# Altium PCB Teensy4-CANTool-Rev2.PcbDoc
Units mil, origin at the board's own origin, x right, y up, seen from the top; angles counter-clockwise.
Board outline 1207.34 x 2795 mil, 2 copper layers (Top Layer, Bottom Layer); 27 components, 38 nets, 145 pads, 18 vias.
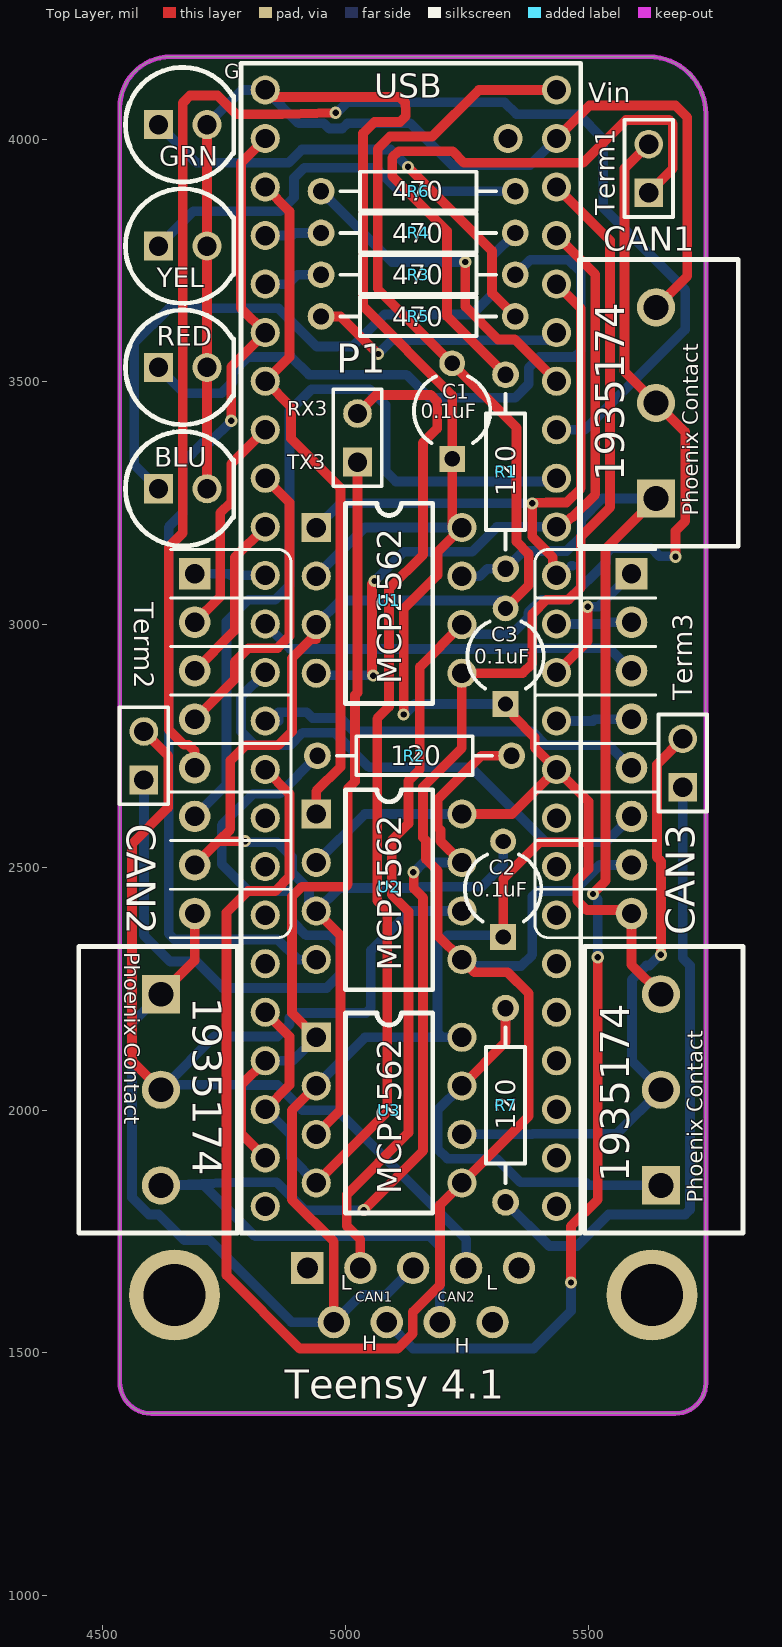
[diagram p0: Top Layer view]
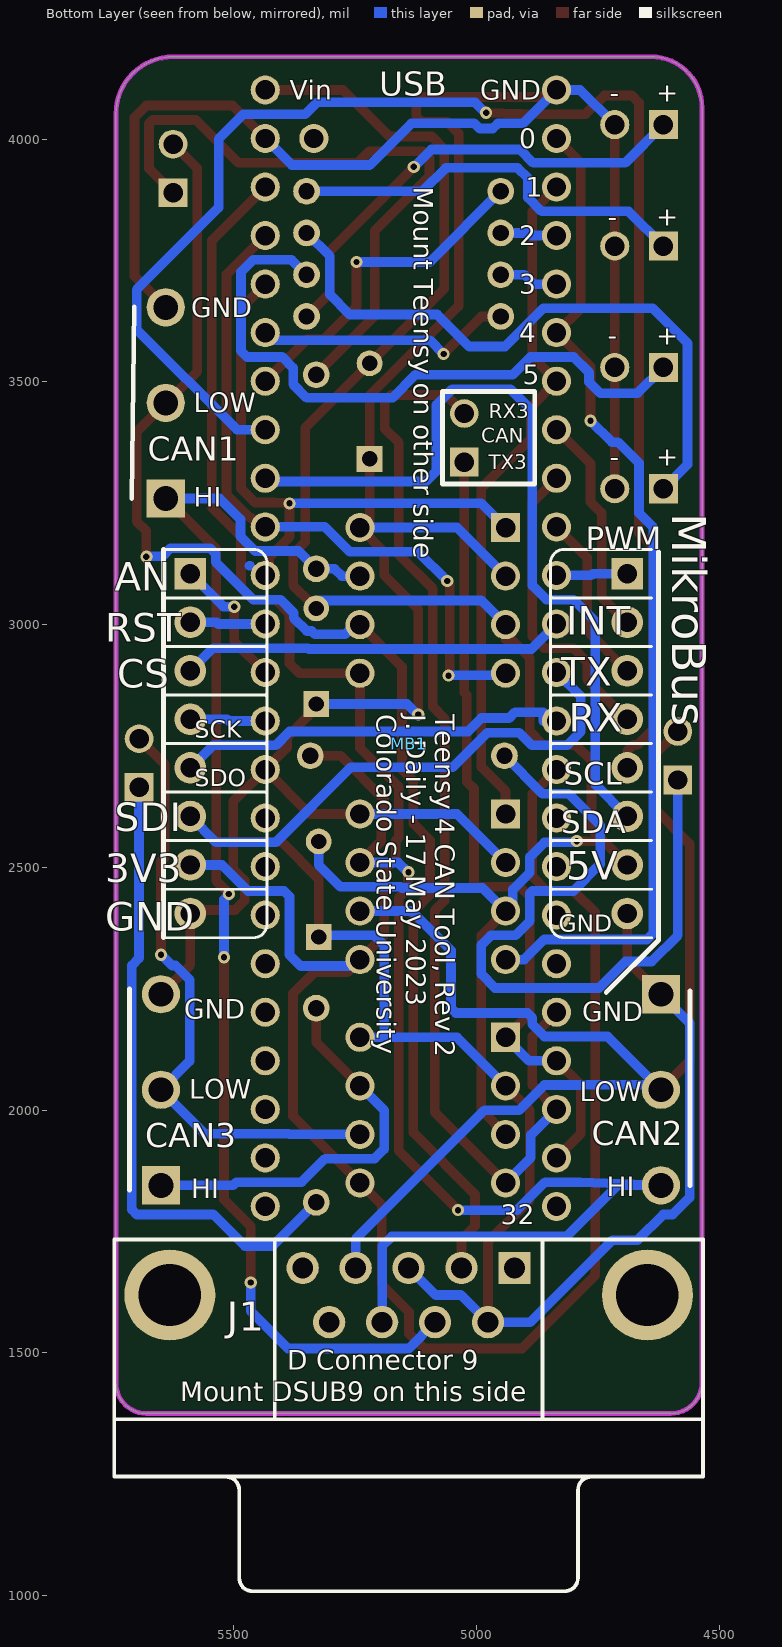
[diagram p1: Bottom Layer view, seen from below]

## Layer stack, top to bottom
Top Solder: solder mask 0.4, Solder Resist, Dk 3.5
Top Layer: signal copper 1.4
Dielectric 1: dielectric 12.6, FR-4, Dk 4.8
Bottom Layer: signal copper 1.4
Bottom Solder: solder mask 0.4, Solder Resist, Dk 3.5

## Board outline
4535.31,1439.69 ccw(c4600,1439.69) 4600,1375 5679.69,1375 ccw(c5679.69,1437.97) 5742.66,1437.97 5742.66,4052.34 ccw(c5625,4052.34) 5625,4170 4640,4170 ccw(c4640,4065.31) 4535.31,4065.31

## Design rules (kind name [scope] priority, off if disabled: settings)
Clearance [All] p1: gap=10 ignorepadtopadclearanceinfootprint=FALSE except(0: Arc-Hole Track-Hole SMDPad-Hole THPad-Hole Via-Hole Fill-Hole Poly-Hole Region-Hole Text-Hole)
PolygonConnect [All] p1: connectstyle=Relief reliefconductorwidth=10 reliefentries=4 polygonreliefangle="90 Angle" airgapwidth=10
RoomDefinition Teensy4-CANTool [InComponentClass('Teensy4-CANTool')] p1: confinementstyle=ConfineIn formatcopy=TRUE lockcomponents=FALSE outline 0,0 2000,0 2000,1000 0,1000
RoutingVias [All] p1: holewidth=13 width=25 viastyle="Through Hole" minholewidth=13 minwidth=20 maxholewidth=28 maxwidth=50
SolderMaskExpansion [All] p1: expansion=4 istentingtop=FALSE
Width [All] p1: maxlimit=50 minlimit=10 preferedwidth=20 minimp=50.000000 maximp=50.000000 favimp=50.000000
30 further rules are at their usual default settings.

## Components (designator, comment, footprint, x,y, rotation, side; value= is the part's Value field where it differs from the comment)
BLU "LED" "LED - 5mm Through Hole" 4615,3280 r180 top
C1 "0.1uF" CAPR5-4X5 5220,3440 r90 top
C2 "0.1uF" CAPR5-4X5 5325,2455 r90 top
C3 "0.1uF" CAPR5-4X5 5330,2935 r90 top
CAN1 "Header 3" "PCB TERMINAL BLOCK - 3" 5640,3260 r90 top
CAN2 "Header 3" "PCB TERMINAL BLOCK - 3" 4620,2238.7 r270 top
CAN3 "Header 3" "PCB Terminal Block - 3" 5650,1845 r90 top
GRN "LED" "LED - 5mm Through Hole" 4615,4030 r180 top
J1 "D Connector 9" DSUB1.385-2H9 5139.76,1245 r0 bottom locked
MB1 "mikroBUS" "mikroBUS - Midi" 5639.46,2255 r180 bottom locked
P1 "Header 2" HDR1X2 5025,3335 r90 top
R1 "120" AXIAL-0.4 5330,3315 r90 top
R2 "120" AXIAL-0.4 5142.38,2730 r180 top
R3 "470" AXIAL-0.4 5150,3721 r180 top
R4 "470" AXIAL-0.4 5150,3807 r180 top
R5 "470" AXIAL-0.4 5150,3635 r180 top
R6 "470" AXIAL-0.4 5150,3893 r180 top
R7 "120" AXIAL-0.4 5330,2010 r270 top
RED "LED" "LED - 5mm Through Hole" 4615,3530 r180 top
"Teensy 4.1" "Teensy 4.1" "Teensy 4.1" 4835,2801.57 r0 top
Term1 "Header 2" HDR1X2 5625,3890 r90 top
Term2 "Header 2" HDR1X2 4585,2680 r90 top
Term3 "Header 2" HDR1X2 5695,2665 r90 top
U1 "MCP2562" DIP8 4940,3200 r0 top
U2 "MCP2562" DIP8 4940,2610 r0 top
U3 "MCP2562" DIP8 4940,2150 r0 top
YEL "LED" "LED - 5mm Through Hole" 4615,3780 r180 top

## Footprints (in the part's own frame and the unit in brackets; to place one, negate y for a bottom-side part, rotate by r counter-clockwise, add the part's x,y. Pads: shape width x height; smd on the part's side, far side on the other; paste and mask are expansions set on the pad)
AXIAL-0.4 [mm] "Axial Device, Thru-Hole; 2 Leads; 0.4 in Pin Spacing"
  round 1.4 hole 0.85: 1(-5.08,0) 2(5.08,0)
  silkscreen extent -4.06,-1.02 4.06,1.02
CAPR5-4X5 [mm] "Capacitor; 2 Leads"
  rect 1.35x1.35 hole 0.8: 1(-2.5,0)
  round 1.35 hole 0.8: 2(2.5,0)
  silkscreen extent -1.69,-2 1.82,2
DIP8 [mil]
  rect 60x60 hole 40: 1(0,0)
  round 60 hole 40: 2(0,-100) 3(0,-200) 4(0,-300) 5(300,-300) 6(300,-200) 7(300,-100) 8(300,0)
  silkscreen extent 60,-362 240,50
DSUB1.385-2H9 [mm] "Connector; D Subminiature; 9 Position; Right Angle; Pitch 1.385 mm"
  rect 1.69x1.69 hole 1.09: 1(-5.54,-10.92)
  round 1.69 hole 1.09: 2(-2.77,-10.92) 3(0,-10.92) 4(2.77,-10.92) 5(5.54,-10.92) 6(-4.155,-8.08) 7(-1.385,-8.08) 8(1.385,-8.08) 9(4.155,-8.08)
  round 4.76 hole 3.26: 10(-12.495,-9.5) 11(12.495,-9.5)
  silkscreen extent -15.4,-12.4 15.4,6
HDR1X2 [mm] "Connector; Header; 2 Position"
  rect 1.5x1.5 hole 1.016: 1(0,0)
  round 1.5 hole 1.016: 2(2.54,0)
  silkscreen extent -1.27,-1.27 3.81,1.27
"LED - 5mm Through Hole" [mil] "Vishay TLCS510 Ultrabright LED, Ø 5 mm Untinted Non-Diffused Package"
  rect 60x60 hole 40: 1(0,0)
  round 60 hole 40: 2(-100,0)
  silkscreen extent -155,-118 68,118
"mikroBUS - Midi" [mil]
  rect 65x65 hole 40: 1(50,850) 16(950,850)
  round 65 hole 40: 2(50,750) 3(50,650) 4(50,550) 5(50,450) 6(50,350) 7(50,250) 8(50,150) 9(950,150) 10(950,250) 11(950,350) 12(950,450) 13(950,550) 14(950,650) 15(950,750)
  silkscreen extent 0,100 1000,900, body extent -5,100 1010,900, height 82
"PCB TERMINAL BLOCK - 3" [mm] "3 Position Wire to Board Terminal Block Horizontal with Board 0.197\" (5.00mm) Through Hole"
  rect 2x2 hole 1.3: 1(0,0)
  round 2 hole 1.3: 2(5,0) 3(10,0)
  silkscreen extent -2.5,-4.3 12.5,4
"PCB Terminal Block - 3" [mm] "3 Position Wire to Board Terminal Block Horizontal with Board 0.197\" (5.00mm) Through Hole"
  rect 2x2 hole 1.3: 1(0,0)
  round 2 hole 1.3: 2(5,0) 3(10,0)
  silkscreen extent -2.5,-4.3 12.5,4
"Teensy 4.1" [mil] "32 bit Arduino Compatible Microcontroller www.pjrc.com/teensy"
  round 60 hole 40: 0(0,1200) 1(0,1100) 2(0,1000) 3(0,900) 3V3a(600,1100) 3V3c(0,-100) 4(0,800) 5(0,700) 6(0,600) 7(0,500) 8(0,400) 9(0,300) 10(0,200) 11(0,100) 12(0,0) 13(600,0) 14(600,100) 15(600,200) 16(600,300) 17(600,400) 18(600,500) 19(600,600) 20(600,700) 21(600,800) 22(600,900) 23(600,1000) 24(0,-200) 25(0,-300) 26(0,-400) 27(0,-500) 28(0,-600) 29(0,-700) 30(0,-800) 31(0,-900) 32(0,-1000) 33(600,-1000) 34(600,-900) 35(600,-800) 36(600,-700) 37(600,-600) 38(600,-500) 39(600,-400) 40(600,-300) 41(600,-200) G1(0,1300) G2(600,1200) G4(600,-100) Vin(600,1300) VUSB(500,1200)
  silkscreen extent -50,-1055 650,1355

## Part data
BLU: "Blue 470nm LED Indication - Discrete 3.2V Radial", Manufacturer="Würth Elektronik", PartNumber=151051BS04000, Supplier Part Number 1=732-5015-ND, Supplier 1=Digi-Key
C1 C2 C3: library part Cap, "0.1µF ±10% 50V Ceramic Capacitor X7R 0603 (1608 Metric)", Manufacturer="Vishay Beyschlag/Draloric/BC Components", PartNumber=K104K15X7RF53H5, Supplier Part Number 1=BC3323-ND, Supplier 1=Digi-Key
CAN1 CAN2 CAN3: "Header, 3-Pin", Manufacturer="Phoenix Contact", PartNumber=1935174, Supplier Part Number 1=277-1578-ND, Supplier 1=Digi-Key
GRN: "Green 572nm LED Indication - Discrete 2.1V Radial", Manufacturer="Würth Elektronik", PartNumber=151051VS04000, Supplier Part Number 1=732-5017-ND, Supplier 1=Digi-Key
J1: "CONN D-SUB PLUG 9POS R/A SLDR", Manufacturer="Assmann WSW Components", PartNumber="A-DS 09 A/KG-T2S", Supplier Part Number 1=AE10968-ND, Supplier 1=Digi-Key
MB1: library part "mikroBUS compatible add-on board", "mikroBUS compatible add-on board"
P1: "Header, 2-Pin"
R1 R2 R7: library part Res1, "120 Ohms ±5% 0.25W, 1/4W Through Hole Resistor Axial Carbon Film", Manufacturer=YAGEO, PartNumber=CFR-25JB-52-120R, Supplier Part Number 1=120QBK-ND, Supplier 1=Digi-Key
R3 R4 R5 R6: library part Res1, "470 Ohms ±5% 0.25W, 1/4W Through Hole Resistor Axial Carbon Film", Manufacturer=YAGEO, PartNumber=CFR-25JB-52-470R, Supplier Part Number 1=470QBK-ND, Supplier 1=Digi-Key
RED: "Red 645nm LED Indication - Discrete 2.1V Radial", Manufacturer="Würth Elektronik", PartNumber=151051RS11000, Supplier Part Number 1=732-5016-ND, Supplier 1=Digi-Key
"Teensy 4.1": "32 Bit Arduino-Compatible iMX Microcontroller", Manufacturer=PRJC, Supplier Part Number 1=1568-DEV-16771-ND, PartNumber="Teensy 4.1", Supplier 1=Digi-Key
Term1 Term2 Term3: "2 (1 x 2) Position Shunt Connector Open Top, Grip 0.100\" (2.54mm) Gold", Manufacturer="Sullins Connector Solutions", PartNumber=NPC02SXON-RC, Supplier Part Number 1=S9341-ND, Supplier 1=Digi-Key
U1 U2 U3: library part MCP2551, "1/1 Transceiver CANbus 8-PDIP", Manufacturer="Microchip Technology", PartNumber=MCP2562FD-E/P, Supplier Part Number 1=MCP2562FD-E/P-ND, Supplier 1=Digi-Key
YEL: "Yellow 590nm LED Indication - Discrete 2V Radial", Manufacturer="Würth Elektronik", PartNumber=151051YS04000, Supplier Part Number 1=732-5018-ND, Supplier 1=Digi-Key

## Via types
v1: diameter 25, hole 13, Top Layer to Bottom Layer, 18 vias

## Nets (pads, with @x,y where several pads share a name; then routed paths per layer and width w, separated by ;. In a path a pad name is that pad's centre, name@x,y a point inside that pad or via, vN(x,y) a via of type N, cw(c..) or ccw(c..) an arc to the next point about the centre after c; other vN are vias at no path point)
3V3: "Teensy 4.1.3V3a" "Teensy 4.1.3V3c" MB1.7 U1.5 U2.5 U3.5 | length 5015.4
  Top Layer w20: 4835,2701.57 4885,2651.57 4885,2480.86 4855.71,2451.57 4799.57,2451.57 4755,2407 4755,1660 4906,1509 5108,1509 5139,1540 5139,1584 5195,1640 5195,1805 U3.5 5378,1988 5378,2240 5334,2284 5266,2284 U2.5 5190,2360 5190,2493.1 5166.14,2516.96 5166.14,2555.6 5160,2561.74 5160,2665.79 5240,2745.79 U1.5 5365,2900 5385,2920 5385,3022.29 5414.29,3051.57 5460,3051.57 5485,3076.57 5485,3181.79 5545,3241.79 5545,3791.57 5435,3901.57
  Bottom Layer w20: U2.5 5253,2297 5362,2297 5385,2320 5385,2440 5396.57,2451.57 5470.61,2451.57 5524.04,2505 MB1.7
5V: "Teensy 4.1.Vin" C1.2 C2.2 C3.2 MB1.10 U1.3 U2.3 U3.3 | length 3842.4
  Top Layer w20: MB1.10 4738.46,2554 ; v1(4793.48,2554) 4738.46,2554 ; U3.3 4990,2000 4990,2360 U2.3 ; U1.3 4940,2970 4928.92,2970 4890,2931.08 4890,2780 4861.57,2751.57 4794.57,2751.57 4763,2720 4763,2578.54 4738.46,2554 ; C3.2@5329.17,3044.25 5340.83,3044.25 5377.56,3080.99 5377.56,3145.88 5352.5,3170.94 5352.5,3405.93 C1.2 5066.5,3691.93 5066.5,3980 5092.06,4005.56 5178.99,4005.56 5275,4101.57 5435,4101.57
  Bottom Layer w20: v1(4793.48,2554) 4795.91,2551.57 4860,2551.57 4890,2521.57 4890,2489.29 4925,2454.29 4925,2410 U2.3 4987.5,2457.5 5153.46,2457.5 5155.96,2460 5280,2460 5325,2505 C2.2 ; U1.3 4990,3050 5325,3050 C3.2@5325,3048.43
AN: "Teensy 4.1.14" MB1.1 | length 280.6
  Top Layer w20: 5435,2901.57 5499,2965.57 v1(5499,3037)
  Bottom Layer w20: v1(5499,3037) 5521.46,3037 MB1.1
Blue: "Teensy 4.1.2" R4.2 | length 117.2
  Bottom Layer w20: 4835,3801.57 4889.57,3801.57 4895,3807 R4.2
CANH1: CAN1.1 J1.7 R1.1 U1.7 | length 2675.7
  Top Layer w20: v1(5465,1645) 5465,1760.86 5520,1815.86 v1(5520,2315) ; v1(5510,2445) 5510,2446.35 5536,2472.35 5536,3156 CAN1.1
  Bottom Layer w20: J1.7 5139.35,1509 5388,1509 5465,1586 v1(5465,1645) ; U1.7 5277,3100 5292,3115 R1.1 5366.57,3151.57 5455.71,3151.57 5486.12,3181.99 5486.12,3217.09 5529.04,3260 CAN1.1 ; v1(5510,2445) 5510,2443.65 5520,2433.65 v1(5520,2315)
CANH2: CAN2.3 J1.8 R2.1 U2.7 | length 2428.4
  Top Layer w20: v1(5038,1794) 5160,1916 5160,2437.5 5140.96,2456.54 5140.96,2489.04 v1(5140,2490) ; U2.7 5196.14,2553.86 5196.14,2576.96 5190,2583.1 5190,2640 5280,2730 R2.1
  Bottom Layer w20: v1(5038,1794) 4916,1794 4858.43,1851.57 4786.57,1851.57 CAN2.3 4709.26,1845 4814.26,1740 5174.29,1740 5194.29,1720 J1.8 ; v1(5140,2490) 5141.35,2490 5161.35,2510 U2.7
CANH3: CAN3.1 R7.1 U3.7 | length 839.1
  Top Layer w20: U3.7 5330,2140 R7.1
  Bottom Layer w20: U3.7 5190,2000 5190,1920 5210,1900 5311.57,1900 5360,1851.57 5494.43,1851.57 5501,1845 CAN3.1
CANL1: CAN1.2 J1.2 Term1.2 U1.6 | length 2939.4
  Top Layer w20: J1.2 5030.71,1733.61 5002.92,1761.4 5002.92,1826.5 5130,1953.58 5130,2409.24 5095.5,2443.74 5095.5,2555.6 5130,2590.1 5130,2678.22 5153.27,2701.49 5153.27,2913.27 U1.6 ; Term1.2 5575,3940 5575,3521.85 5700,3396.85 5700,3212.98 5680,3192.98 v1(5680,3140)
  Bottom Layer w20: U1.6 5250.82,3000 5270.82,2980 5332.57,2980 5339.42,2986.85 5349.29,2986.85 5376.57,3014.13 5376.57,3024.57 5403.57,3051.57 5460,3051.57 5536.96,3128.53 5536.96,3145.78 5548.68,3157.5 5630.24,3157.5 5646.79,3140.96 5679.04,3140.96 v1(5680,3140)
CANL2: CAN2.2 J1.4 Term2.2 U2.6 | length 2473.8
  Top Layer w20: Term2.2 4635,2730 4635,2623 4560.63,2548.63 4560.63,2101.22 CAN2.2
  Bottom Layer w20: CAN2.2 CAN2.2@4630.15,2052 ; U2.6 5133.62,2410 5052.5,2328.88 5052.5,2210 5042.5,2200 4895,2200 4885,2190 4885,2176.57 4860,2151.57 4729.72,2151.57 CAN2.2@4630.15,2052 ; J1.4 5248.82,1734.18 4983,2000 4911.57,2000 4860,2051.57 4785,2051.57 4784.57,2052 CAN2.2@4630.15,2052
CANL3: CAN3.2 Term3.2 U3.6 | length 1250.3
  Top Layer w20: v1(5650,2320) 5650,2512.68 5642,2520.68 5642,2712 Term3.2
  Bottom Layer w20: U3.6 5385,1950 5386.57,1951.57 5559.72,1951.57 CAN3.2 5590.63,2101.22 5590.63,2268.63 5620.07,2298.07 5626.72,2298.07 5648.65,2320 v1(5650,2320)
CANRX1: "Teensy 4.1.17" "Teensy 4.1.23" U1.4 | length 1418.3
  Top Layer w20: v1(5057.5,2895) 5055,2897.5 5055,3083.65 5060,3088.65 v1(5060,3090) ; 5425,3195 5428.43,3195 5435,3201.57 5445.82,3201.57 5465.82,3221.57 5468.14,3221.57 5515,3268.44 5515,3721.57 5435,3801.57
  Bottom Layer w20: U1.4 4944.04,2895.96 5056.54,2895.96 v1(5057.5,2895) ; v1(5060,3090) 5120,3150 5260.71,3150 5312.28,3201.57 5418.43,3201.57 5425,3195
CANRX2: "Teensy 4.1.0" "Teensy 4.1.4" U2.4 | length 2095.4
  Top Layer w20: v1(4765,3420) 4765,3531.57 4835,3601.57 4785,3651.57 4785,3951.57 4835,4001.57
  Bottom Layer w20: v1(4765,3420) 4721.02,3376.02 4708.02,3376.02 4665,3333 4665,3230 4636,3201 4636,2364 4648.43,2351.57 4860.43,2351.57 4902,2310 U2.4
CANRX3: "Teensy 4.1.28" "Teensy 4.1.30" P1.2 U3.4 | length 2351.7
  Top Layer w20: 4835,2001.57 4885,2051.57 4885,2151.57 4835,2201.57 ; U3.4 5086,1996 5086,2410.81 5065.5,2431.31 5065.5,2806.46 5090,2830.96 5090,3074.04 5160,3144.04 5160,3375 5189,3404 5189,3460 5176,3473 5063,3473 P1.2
  Bottom Layer w20: 4835,2001.57 4888,1948.57 4888,1902 U3.4
CANTX1: "Teensy 4.1.16" "Teensy 4.1.22" U1.1 | length 1191.4
  Top Layer w20: 5435,3101.57 5427.35,3109.23 5427.35,3138.52 5385,3180.86 v1(5385,3250) 5385.96,3250.96 5413.67,3250.96 5414.29,3251.57 5455.71,3251.57 5485,3280.86 5485,3651.57 5435,3701.57
  Bottom Layer w20: U1.1 4990,3250 v1(5385,3250) ; 5465.82,3121.57 5468.14,3121.57
CANTX2: "Teensy 4.1.1" "Teensy 4.1.5" U2.1 | length 1417.9
  Top Layer w20: 4835,3901.57 4885,3851.57 4885,3551.57 4835,3501.57 4888,3448.57 4888,3383.57 4990,3281.57 4990,2707 4940,2657 U2.1
CANTX3: "Teensy 4.1.29" "Teensy 4.1.31" P1.1 U3.1 | length 1680.8
  Top Layer w20: 4835,1901.57 4785,1951.57 4785,2051.57 4835,2101.57 ; U3.1 4890,2200 4890,2440 4910,2460 5000,2460 5005,2465 5005,2662 5020,2677 5020,2855 5025,2860 P1.1
  Bottom Layer w20: 4835,2101.57 4891.57,2101.57 U3.1
CS: "Teensy 4.1.10" MB1.3 | length 795.8
  Bottom Layer w20: 4835,3001.57 4886.57,2950 5345,2950 5346.57,2951.57 5542.89,2951.57 MB1.3
GND: "Teensy 4.1.G1" "Teensy 4.1.G2" "Teensy 4.1.G4" BLU.2 C1.1 C2.1 C3.1 CAN1.3 CAN2.1 CAN3.3 GRN.2 J1.3 J1.6 MB1.8 MB1.9 RED.2 U1.2 U1.8 U2.2 U2.8 U3.2 U3.8 YEL.2 | length 8955.7
  Top Layer w20: CAN2.1 4689.46,2308.16 MB1.9 ; BLU.2 RED.2 YEL.2 GRN.2 ; 4835,4101.57 4849.62,4086.96 5111.87,4086.96 5123.21,4075.62 5124.09,4056.49 5124.11,4056.02 5124.11,4055.56 5124.11,4047.28 5112.4,4035.56 5060,4035.56 5036.5,4012.06 5036.5,3656.06 5220,3472.56 C1.1 5220,3200 U1.8 5190,3150 5190,3102 5120,3032 v1(5120,2815) ; U3.2 4890,2000 4890,1815.18 4976.18,1729 J1.6 ; U2.8 5343.43,2610 5435,2701.57 ; C2.1 5325,2476.57 5400,2551.57 5501,2551.57 ; C3.1@5325,2833 5333.57,2833 5346.57,2820 5346.57,2811.43 5390,2768 5390,2746.57 5435,2701.57 ; 5435,4001.57 5502.95,4069.53 5680,4069.53 5704.53,4045 5704.53,3718.23 CAN1.3 ; CAN3.3 5589.46,2299.24 MB1.8 5582.38,2412.08 5496.96,2412.08 5477.5,2431.54 5477.5,2473.36 5501,2496.86 5501,2551.57 ; 5435,2701.57 5501,2635.57 5501,2551.57
  Bottom Layer w20: CAN2.1 4560.63,2179.33 4560.63,1820 4595.63,1785 4615,1785 4668,1732 4720,1732 4888.89,1563.11 J1.6 5032.07,1619 5083.84,1619 J1.3 ; GRN.2 4786.57,4101.57 4835,4101.57 4903.66,4032.91 4955.58,4032.91 4966.54,4021.96 4993.46,4021.96 5004.42,4032.91 5133.81,4032.91 5219.72,3947 5380.43,3947 5435,4001.57 ; U3.2 5040,2150 5200,2150 ; U2.2 5040,2610 U2.8 ; U1.2 5040,3200 U1.8 ; v1(5120,2815) 5121.35,2815 5142.93,2836.57 5313.43,2836.57 5325,2848.15 C3.1@5325,2851.57 ; U3.8 5200,2150 ; C2.1 5321.57,2360 5210,2360 5190,2340 5190,2160 5200,2150
Green: "Teensy 4.1.21" R5.2 | length 544.5
  Top Layer w20: R5.2 4990,3635 v1(5067.5,3557.5)
  Bottom Layer w20: v1(5067.5,3557.5) 5096,3586 5435,3586 5435,3601.57
INT: "Teensy 4.1.6" MB1.15 | length 456.9
  Top Layer w20: MB1.15 4741.96,3057.5 4741.96,3230 4765,3253.04 4765,3331.57 4835,3401.57
MISO: "Teensy 4.1.12" MB1.5 | length 820.3
  Bottom Layer w20: 4835,2801.57 4862.19,2801.57 4862.19,2819.87 4920.09,2819.87 4932.41,2807.56 4990.01,2807.56 5017.57,2780 5385,2780 5413.43,2751.57 5542.89,2751.57 MB1.5
MOSI: "Teensy 4.1.11" MB1.6 | length 1085
  Bottom Layer w20: 4835,2901.57 4785,2851.57 4785,2780 4813.43,2751.57 4886,2751.57 4911.99,2777.56 4977.59,2777.56 5049.15,2706 5259,2706 5413.43,2551.57 5536.03,2551.57 MB1.6
NetBLU_1: BLU.1 R4.1 | length 1311.1
  Bottom Layer w20: BLU.1 4565,3330 4565,3580 4636.57,3651.57 4862.43,3651.57 4941,3573 5014.99,3573 5080.99,3639 5261,3639 5302,3680 5302,3759 R4.1
NetGRN_1: GRN.1 R5.1 | length 972.3
  Top Layer w20: v1(5129,3943.06) 5302,3770.06 5302,3683 R5.1
  Bottom Layer w20: GRN.1 4693.43,3951.57 4883,3951.57 4910.43,3979 5093.06,3979 v1(5129,3943.06)
NetR1_2: R1.2 Term1.1 | length 1339.4
  Top Layer w20: R1.2 5209.5,3635.5 5209.5,3811 5096.5,3924 5096.5,3962.06 5110,3975.56 5220.56,3975.56 5244.55,3951.57 5490,3951.57 5577.95,4039.53 5667,4039.53 5674.53,4032 5674.53,3939.53 Term1.1
NetR2_2: R2.2 Term2.1 | length 1526.2
  Bottom Layer w20: Term2.1 4585,2360 4639,2306 4693,2306 4747.43,2251.57 4961.57,2251.57 4990,2280 4990,2340 4970,2360 4919.29,2360 4890,2389.29 4890,2446.57 4885,2451.57 4800,2451.57 4745.09,2506.49 4745.09,2587 4809.66,2651.57 4863.95,2651.57 R2.2
NetR3_1: R3.1 RED.1 | length 1349.7
  Bottom Layer w20: RED.1 4668,3477 4745,3477 4768,3500 4768,3520 4799.57,3551.57 4888.43,3551.57 4925,3515 5125.44,3515 5173,3467.44 5349.7,3467.44 5377.56,3495.3 5377.56,3529.13 5400,3551.57 5472.43,3551.57 5485,3564.15 5485,3726.57 5460,3751.57 5380.57,3751.57 R3.1
NetR6_1: R6.1 YEL.1 | length 845
  Bottom Layer w20: YEL.1 4686.57,3851.57 4865.57,3851.57 4894,3880 4894,3920 4915,3941 5063,3941 5111,3893 R6.1
NetR7_2: R7.2 Term3.1 | length 1324.6
  Bottom Layer w20: R7.2 5420,1720 5477,1720 5542,1785 5700,1785 5710,1795 5710,2298 5695,2313 Term3.1
PWM: "Teensy 4.1.9" MB1.16 | length 147
  Bottom Layer w20: MB1.16 4760,3105 4763.43,3101.57 4835,3101.57
Red: "Teensy 4.1.3" R3.2 | length 123
  Bottom Layer w20: 4835,3701.57 4882,3701.57 4901.43,3721 R3.2
RST: "Teensy 4.1.15" MB1.2 | length 155.9
  Bottom Layer w20: 5435,3001.57 5532,3001.57 5535.43,3005 MB1.2
RX2: "Teensy 4.1.7" MB1.13 | length 633.4
  Top Layer w20: MB1.13 4771.96,2887.5 4771.96,2923.53 4800,2951.57 4860,2951.57 4885,2976.57 4885,3251.57 4835,3301.57
SCK: "Teensy 4.1.13" MB1.4 | length 155.9
  Bottom Layer w20: 5435,2801.57 5510,2801.57 5513.43,2805 MB1.4
SCL: "Teensy 4.1.19" MB1.12 | length 3150.9
  Top Layer w20: MB1.12 4689.46,2740 4676.96,2752.5 4667.71,2752.5 4636,2784.21 4636,3160 4665,3189 4665,4075 4680,4090 4736.57,4090 4775,4051.57 4861.64,4051.57 4869.91,4051.57 v1(4980,4054.46)
  Bottom Layer w20: v1(4980,4054.46) 4981.35,4054.46 5002.9,4076 5328,4076 5352.43,4051.57 5480,4051.57 5531,4000.57 5531,3859 5700,3690 5700,3608.15 5493.43,3401.57 5435,3401.57
SDA: "Teensy 4.1.18" MB1.11 | length 1678.3
  Bottom Layer w20: MB1.11 4755,2670.54 4755,3006.57 4800,3051.57 4855.71,3051.57 4885,3080.86 4885,3440 4930,3485 5050,3485 5082.5,3452.5 5082.5,3316.54 5104.04,3295 5428.43,3295 5435,3301.57
TX2: "Teensy 4.1.8" MB1.14 | length 356.9
  Top Layer w20: MB1.14 4772,2987.54 4772,3138.57 4835,3201.57
Yellow: "Teensy 4.1.20" R6.2 | length 701
  Top Layer w20: v1(5247,3747) 5247,3655 5314.57,3587.43 5349.15,3587.43 5435,3501.57
  Bottom Layer w20: R6.2 5096,3747 v1(5247,3747)
pads on no net: "Teensy 4.1.24" "Teensy 4.1.25" "Teensy 4.1.26" "Teensy 4.1.27" "Teensy 4.1.32" "Teensy 4.1.33" "Teensy 4.1.34" "Teensy 4.1.35" "Teensy 4.1.36" "Teensy 4.1.37" "Teensy 4.1.38" "Teensy 4.1.39" "Teensy 4.1.40" "Teensy 4.1.41" "Teensy 4.1.VUSB" J1.1 J1.5 J1.9 J1.10 J1.11

## Keep-outs
Keep-Out Layer:
  the board outline again, w10

## Silkscreen, mask and mechanical layers (free items; w line width, h text height)
Top Overlay:
  text "RX3" at 4880,3430 h30
  text "TX3" at 4880,3320 h30
  text "L" at 4990,1630 h30
  text "L" at 5290,1630 h30
  text "CAN1" at 5020,1605 h20
  text "CAN2" at 5190,1605 h20
  text "H" at 5035,1505 h30
  text "H" at 5225,1500 h30
Bottom Overlay:
  lines w10: 4560,1845 4560,2245 ; 4625,3150 4625,2350 4732.5,2242.5 ; 5644.46,2355 5644.46,3155 ; 5705,3655 5710,3260 ; 5715,1835 5715,2250 ; 4880,3290 4880,3480 5070,3480 5070,3290 4880,3290
  text "Mount Teensy on other side" at 5128.67,3902 h40 r90
  text "GND" at 5587,3633 h40
  text "LOW" at 5582,3438 h40
  text "RX3" at 4975,3425 h30
  text "CAN1" at 5677,3338 h50
  text "TX3" at 4975,3320 h30
  text "HI" at 5582,3243 h40
  text "Teensy 4 CAN Tool, Rev 2 / J. Daily - 17 May 2023 / Colorado State University" at 5205,2815 h40 r90
  text "GND" at 5602,2188 h40
  text "GND" at 4782,2183 h40
  text "LOW" at 5592,2023 h40
  text "LOW" at 4787,2018 h40
  text "CAN2" at 4762,1928 h50
  text "CAN3" at 5682,1923 h50
  text "HI" at 4732,1823 h40
  text "HI" at 5587,1818 h40
  text "Mount DSUB9 on this side" at 5610,1400 h40

## Text inside footprints (layer, text, board x,y; h text height)
BLU: Bottom Overlay "+" at 4630,3360 h40 r180; Bottom Overlay "-" at 4725,3355 h40 r180
CAN1: Top Overlay "Phoenix Contact" at 5726.61,3224.57 h31.5 r90; Top Overlay "1935174" at 5575,3295 h60 r90
CAN2: Top Overlay "Phoenix Contact" at 4545,2325 h31.5 r270; Top Overlay "1935174" at 4685.12,2232.64 h60 r270
CAN3: Top Overlay "Phoenix Contact" at 5736.61,1809.57 h31.5 r90; Top Overlay "1935174" at 5584.88,1851.06 h60 r90
GRN: Bottom Overlay "+" at 4630,4110 h40 r180; Bottom Overlay "-" at 4725,4105 h40 r180
MB1: Bottom Overlay "SDA" at 4825,2555 h80; Bottom Overlay "SDI" at 5745,2555 h100; Bottom Overlay "GND" at 5765,2350 h100; Bottom Overlay "RX" at 4810,2760 h100; Bottom Overlay "5V" at 4815,2455 h100; Bottom Overlay "SDO" at 5580,2655 h60; Bottom Overlay "TX" at 4825,2855 h100; Bottom Overlay "SCL" at 4820,2655 h80; Bottom Overlay "CS" at 5740,2850 h100; Bottom Overlay "GND" at 4830,2355 h60; Bottom Overlay "SCK" at 5580,2755 h60; Bottom Overlay "3V3" at 5765,2450 h100; Bottom Overlay "RST" at 5765,2945 h100; Bottom Overlay "MikroBus" at 4620,3230 h120 r90; Bottom Overlay "INT" at 4815,2960 h100; Bottom Overlay "AN" at 5745,3050 h100; Bottom Overlay "PWM" at 4775,3140 h80
RED: Bottom Overlay "+" at 4630,3610 h40 r180; Bottom Overlay "-" at 4730,3605 h40 r180
"Teensy 4.1": Top Overlay "USB" at 5060,4085 h50; Top Overlay "G" at 4750,4125 h30; Top Overlay "Vin" at 5500,4076.57 h40; Bottom Overlay "CAN" at 4990,3375 h30; Bottom Overlay "USB" at 5200,4090 h50; Bottom Overlay "3" at 4911.68,3681.57 h40; Bottom Overlay "4" at 4911.68,3581.57 h40; Bottom Overlay "GND" at 4991.66,4081.57 h40; Bottom Overlay "0" at 4911.68,3981.57 h40; Bottom Overlay "1" at 4898.35,3881.57 h40; Bottom Overlay "2" at 4911.68,3781.57 h40; Bottom Overlay "5" at 4905,3495 h40; Bottom Overlay "Vin" at 5384.93,4081.57 h40; Bottom Overlay "32" at 4950,1765 h40
YEL: Bottom Overlay "+" at 4630,3855 h40 r180; Bottom Overlay "-" at 4730,3850 h40 r180